# Altium PCB VDK (1).pcbdoc
Units mil, origin at the board's own origin, x right, y up, seen from the top; angles counter-clockwise.
Board outline 6000.63 x 3422.47 mil, 2 copper layers (Top Layer, Bottom Layer); 38 components, 51 nets, 148 pads, 0 vias.
Unrouted connection lines stored in the file: 12.
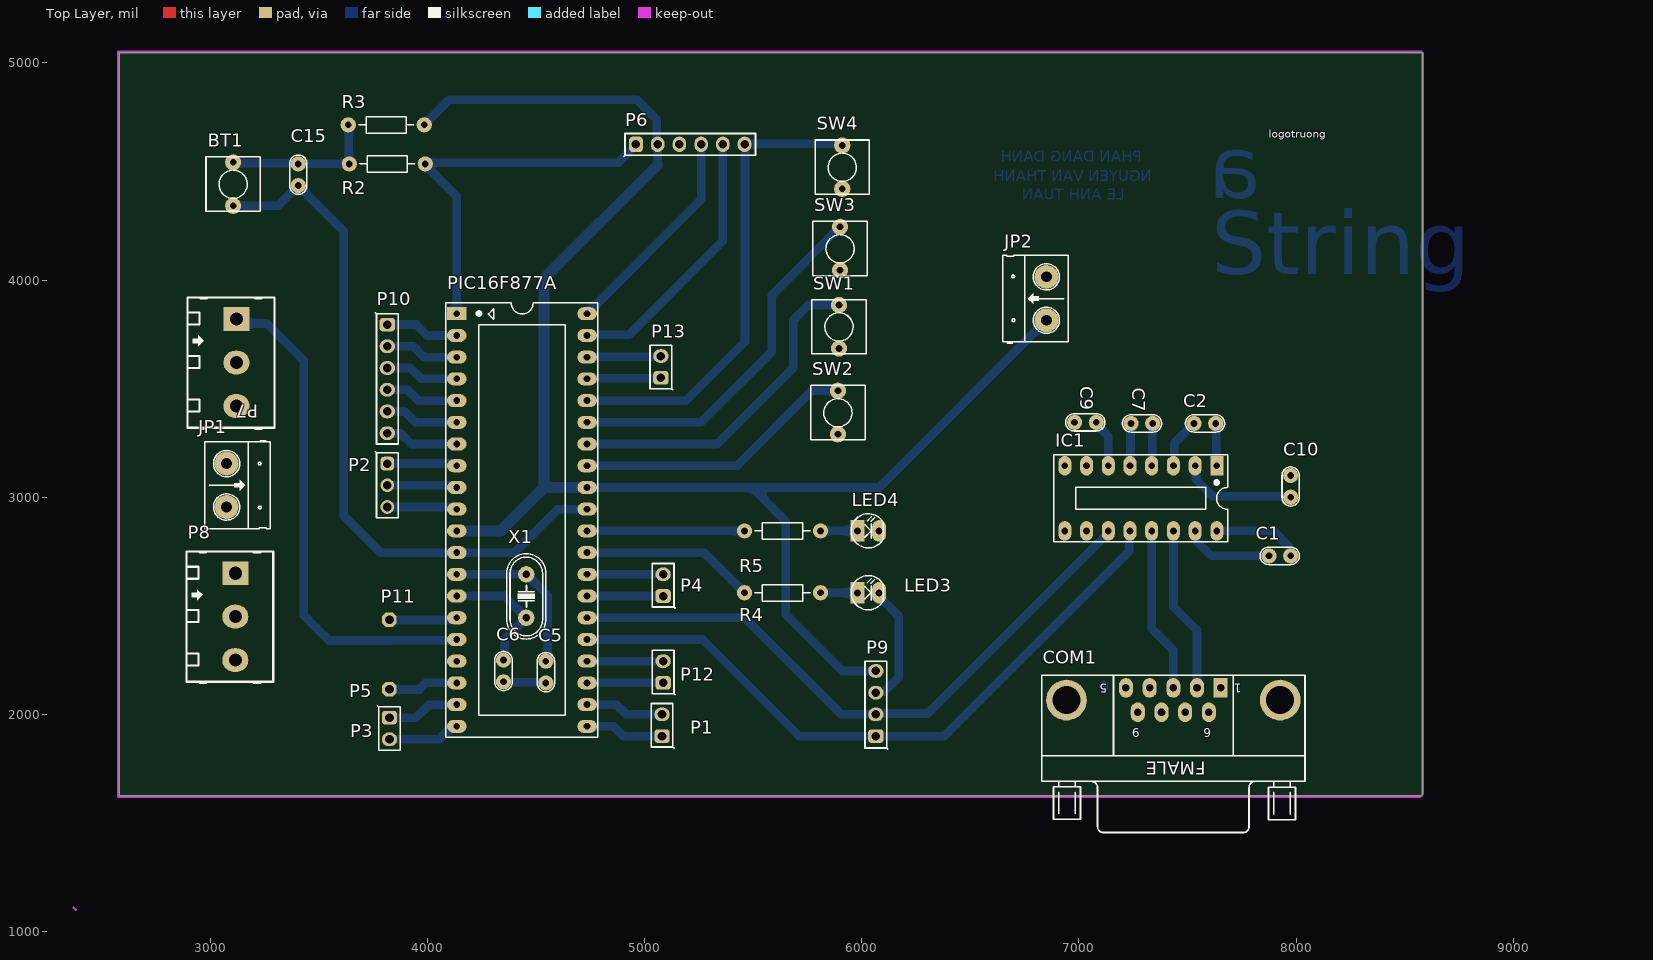
[diagram p0: Top Layer view]
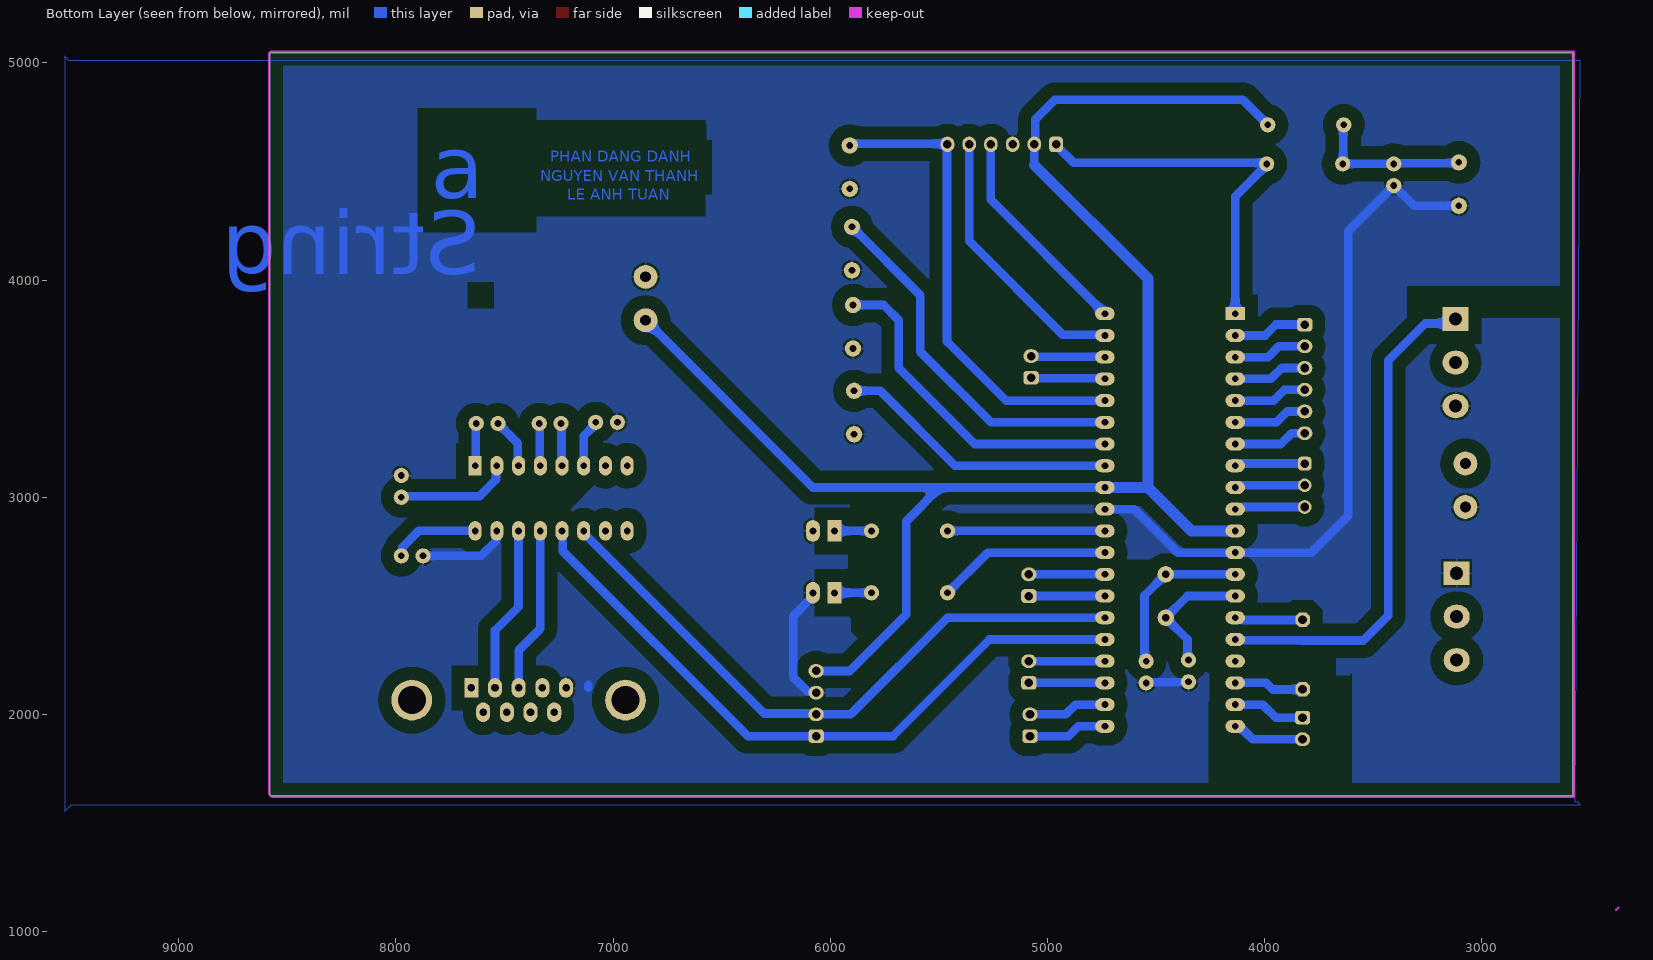
[diagram p1: Bottom Layer view, seen from below]

## Layer stack, top to bottom
Top Solder: solder mask 0.4, Solder Resist, Dk 3.5
Top Layer: signal copper 1.4
Dielectric 1: dielectric 12.6, FR-4, Dk 4.8
Bottom Layer: signal copper 1.4
Bottom Solder: solder mask 0.4, Solder Resist, Dk 3.5

## Board outline
2580.02,1625.02 2580.01,5010 2580.01,5047.48 8580.64,5047.48 8579.98,5045 8579.99,1665 8579.99,1626.89 8578.11,1625.01 8570.26,1625.01

## Design rules (kind name [scope] priority, off if disabled: settings)
Clearance [All] p1: gap=60 ignorepadtopadclearanceinfootprint=FALSE
PolygonConnect [All] p1: connectstyle=Relief reliefconductorwidth=10 reliefentries=4 polygonreliefangle="90 Angle" airgapwidth=10
RoomDefinition "main (1)23" [InComponentClass('main (1)23')] p1: confinementstyle=ConfineIn formatcopy=TRUE lockcomponents=FALSE outline 0,0 2000,0 2000,1000 0,1000
RoutingVias [All] p1: holewidth=28 width=50 viastyle="Through Hole" minholewidth=28 minwidth=50 maxholewidth=28 maxwidth=50
SolderMaskExpansion [All] p1: expansion=4 istentingtop=FALSE
Width [All] p1: maxlimit=40 minlimit=10 preferedwidth=40 toplayer_maxwidth=10 toplayer_prefwidth=10 bottomlayer_minwidth=40 minimp=50.000000 maximp=50.000000 favimp=50.000000
30 further rules are at their usual default settings.

## Components (designator, comment, footprint, x,y, rotation, side; value= is the part's Value field where it differs from the comment)
BT1 "B1" SW2 3105.05,4342.06 r90 top value="SW chip 2 pin"
C1 "2.2uF" CN1 7975,2730 r180 top value=100pF
C2 "2.2uF" CN1 7530,3340 r0 top value=100pF
C5 "15pF" CN1 4545,2245 r270 top value=100pF
C6 "15pF" CN1 4350,2250 r270 top value=100pF
C7 "2.2uF" CN1 7240,3340 r0 top value=100pF
C9 "2.2uF" CN1 7080,3345 r180 top value=100pF
C10 "2.2uF" CN1 7975,3100 r270 top value=100pF
C15 "104" CN1 3405,4435 r90 top value=33pF
COM1 "COM 9 FMALE" "DSB 9-F" 7434.53,2065.91 r180 top value="COM 9"
IC1 "MAX232" DIP16/W0.3 7635,3145 r180 top
JP1 "Header 2_1" HED2 3075,3155 r270 top value="Header 2"
JP2 "Header 2_1" HED2 6850,3815 r90 top value="Header 2"
LED3 "LED" LED-3 5980,2560 r0 top value="LED 3 ly Single Colour"
LED4 "LED" LED-3 5980,2845 r0 top value="LED 3 ly Single Colour"
P1 "Header 2" HDR/Header/2 5080,1950 r90 top
P2 "Header 3" HDR/Header/3/c1 3815,3055 r270 top
P3 "Header 2" HDR/Header/2 3825,1935 r270 top
P4 "Header 2" HDR/Header/2 5085,2595 r90 top
P5 "Header 1" HDR/Header/1 3825,2115 r270 top
P6 "Header 6" HDR/Header/6 5210,4625 r0 top
P7 "Header 3" HDR/Terminal/3 3120,3620 r270 top
P8 "Header 3" HDR/Terminal/3 3115,2450 r270 top
P9 "Header 4" HDR/Header/4 6065,2050 r90 top
P10 "Header 6" HDR/Header/6 3815,3545 r270 top
P11 "Header 1" HDR/Header/1 3825,2435 r0 top
P12 "Header 2" HDR/Header/2 5085,2195 r90 top
P13 "Header 2" HDR/Header/2 5075,3600 r90 top
PIC16F877A "" DIP40/W0.6 4135,3845 r270 top value=PIC16F877A
R2 "470R" R1/4W 3990,4535 r180 top value="R1/4W - 1K"
R3 "4.7k" R1/4W 3635,4715 r0 top value="R1/4W - 1K"
R4 "Res1" R1/4W 5810,2560 r180 top value=330R
R5 "Res1" R1/4W 5810,2845 r180 top value=330R
SW1 "ON" SW2 5895,3685 r90 top value="SW chip 2 pin"
SW2 "OFF" SW2 5890,3290 r90 top value="SW chip 2 pin"
SW3 "ON" SW2 5900,4045 r90 top value="SW chip 2 pin"
SW4 "OFF" SW2 5910,4420 r90 top value="SW chip 2 pin"
X1 "4Mhz" XT2 4455,2545 r90 top

## Footprints (in the part's own frame and the unit in brackets; to place one, negate y for a bottom-side part, rotate by r counter-clockwise, add the part's x,y. Pads: shape width x height; smd on the part's side, far side on the other; paste and mask are expansions set on the pad)
CN1 [mil]
  round 70 hole 31: 1(0,0) 2(100,0)
  silkscreen extent -40,-40 141,40, body extent -60,-30 170,37, height 265
DIP16/W0.3 [mil] "16 PIN, W 300mil, Pin to pin 100mil"
  rect 60x90 hole 31: 1(0,0)
  oval 60x90 hole 31: 2(100,0) 3(200,0) 4(300,0) 5(400,0) 6(500,0) 7(600,0) 8(700,0) 9(700,300) 10(600,300) 11(500,300) 12(400,300) 13(300,300) 14(200,300) 15(100,300) 16(0,300)
  silkscreen extent -50,-50 750,350, body extent -52,-57 752,356, height 299
DIP40/W0.6 [mil] "40 PIN, W 600mil, Pin to pin 100mil"
  rect 60x90 hole 31: 1(0,0)
  oval 60x90 hole 31: 2(100,0) 3(200,0) 4(300,0) 5(400,0) 6(500,0) 7(600,0) 8(700,0) 9(800,0) 10(900,0) 11(1000,0) 12(1100,0) 13(1200,0) 14(1300,0) 15(1400,0) 16(1500,0) 17(1600,0) 18(1700,0) 19(1800,0) 20(1900,0) 21(1900,600) 22(1800,600) 23(1700,600) 24(1600,600) 25(1500,600) 26(1400,600) 27(1300,600) 28(1200,600) 29(1100,600) 30(1000,600) 31(900,600) 32(800,600) 33(700,600) 34(600,600) 35(500,600) 36(400,600) 37(300,600) 38(200,600) 39(100,600) 40(0,600)
  silkscreen extent -50,-50 1950,650, body extent -82,-10 1982,600, height 224
"DSB 9-F" [mil] "COM FMALE - D Subminiature; 9 Position; Right Angle; Pitch 1.385 mm"
  rect 65x90 hole 35: 1(-218.11,-55.91)
  oval 65x90 hole 35: 2(-109.05,-55.91) 3(0,-55.91) 4(109.06,-55.91) 5(218.11,-55.91) 6(-163.58,55.91) 7(-54.53,55.91) 8(54.53,55.91) 9(163.58,55.91)
  round 187.4 hole 128.35: 10(-491.93,0) 11(491.93,0)
  silkscreen extent -606,-114 606,610, body extent -604,-138 608,613, height 495
HDR/Header/1 [mm]
  oct 1.7x1.7 hole 1: 1(0,0)
  body extent -1.27,-1.27 1.27,1.27, height 8.89
HDR/Header/2 [mm]
  rrect50% 1.6x1.8 hole 1: 1(-1.27,0)
  oval 1.6x1.8 hole 1: 2(1.27,0)
  silkscreen extent -2.67,-1.4 2.54,1.27, body extent -2.54,-1.27 2.54,1.27, height 8.89
HDR/Header/3/c1 [mm]
  rrect50% 1.6x1.6 hole 1: 1(-2.54,0)
  round 1.6 hole 1: 2(0,0) 3(2.54,0)
  silkscreen extent -3.94,-1.4 3.81,1.27, body extent -3.81,-1.27 3.81,1.27, height 8.89
HDR/Header/4 [mm]
  rrect50% 1.6x1.8 hole 1: 1(-3.81,0)
  oval 1.6x1.8 hole 1: 2(-1.27,0) 3(1.27,0) 4(3.81,0)
  silkscreen extent -5.33,-1.4 4.95,1.27, body extent -5.08,-1.27 5.08,1.27, height 8.89
HDR/Header/6 [mm]
  rrect50% 1.6x1.8 hole 1: 1(-6.35,0)
  oval 1.6x1.8 hole 1: 2(-3.81,0) 3(-1.27,0) 4(1.27,0) 5(3.81,0) 6(6.35,0)
  silkscreen extent -7.75,-1.4 7.62,1.27, body extent -7.62,-1.27 7.62,1.27, height 8.38
HDR/Terminal/3 [mil]
  rect 110x120 hole 60: 1(-200,0)
  oval 110x120 hole 60: 2(0,0) 3(200,0)
  silkscreen extent -300,-225 305,175, body extent -329,-218 300,168, height 559
HED2 [mil] "Header 2, 2 pin, hight 300mil, Pin to Pin 200, Colour Green"
  round 110 hole 50: 1(0,0) 2(200,0)
  silkscreen extent -106,-100 300,200, body extent -92,-140 302,155, height 394
LED-3 [mil] "LED 2 PIN, 3ly Only colour"
  rect 65x100 hole 32: 1(0,0)
  oval 65x100 hole 32: 2(100,0)
  silkscreen extent -29,-78 118,79, body extent -25,-75 113,75, height 217
R1/4W [mil] "R 1/4W, 2 Pin, 350mil"
  round 70 hole 31: 1(0,0) 2(350,0)
  silkscreen extent 48,-38 302,38, body extent -40,-47 386,47, height 111
SW2 [mil] "SW button 2pin, 250x 250 mil"
  round 75 hole 31: 1(0,0) 2(200,0)
  silkscreen extent -25,-125 225,125
XT2 [mil] "Footpin for Crystal 2 pin"
  round 75 hole 34: 1(-100,0) 2(100,0)
  silkscreen extent -198,-90 195,90, body extent -233,-93 213,90, height 138

## Part data
BT1 SW1 SW2 SW3 SW4: library part SW2, "Switch button 2 pin"
C1 C2 C5 C6 C7 C9 C10: library part CN1, "Cap np  1pF - 472pF"
C15: library part CN0, "Cremic For Xtal 1pF => 100pF"
COM1: library part DSB9F, "COM 9", PackageDocument=O, DatasheetDocument=1-Sep-1999, Gender=Receptacle, LatestRevisionDate=17-Jul-2002, LatestRevisionNote="Re-released for DXP Platform.", Orientation="Right Angle", PackageReference=788750, Positions=9, Published=15-Jun-2001, Publisher="Altium Limited"
IC1: "Dual EIA-232 Driver/Receiver"
JP1 JP2: "Header, 2-Pin", Manufacturer="Generic Components", Class=Connector
LED3 LED4: "LED Single colour Green and Red"
P1 P3 P4 P12 P13: "Header, 2-Pin"
P2 P7 P8: "Header, 3-Pin"
P5 P11: "Header, 1-Pin"
P6 P10: "Header, 6-Pin"
P9: "Header, 4-Pin"
PIC16F877A: library part 16F877, "8K FLASH, 368B RAM, 256B EFROM", Copyright by=VanDungEvn
R2 R3: library part R1/4W, "Resistor 1/4W"
R4 R5: library part Res1_1, "Resistor", Manufacturer="Generic Components", Class=Passive, Published=08/06/2000, Publisher="Altium Hobart Technology Centre", SubClass=Resistor
X1: library part XT2, "Crystal For all Crystal 2pin."

## Nets (pads, with @x,y where several pads share a name; then routed paths per layer and width w, separated by ;. In a path a pad name is that pad's centre, name@x,y a point inside that pad or via, vN(x,y) a via of type N, cw(c..) or ccw(c..) an arc to the next point about the centre after c; other vN are vias at no path point)
GND: BT1.1 C1.2 C5.2 C6.2 C9.2 C10.1 C15.1 COM1.5 IC1.15 JP1.2 JP2.2 LED3.2 LED4.2 P6.3 P7.3 P8.1 P9.3 PIC16F877A.12 PIC16F877A.31 SW1.1 SW2.1 SW3.1 SW4.1 | length 4443.8
  Bottom Layer w30: BT1.1 BT1.1@3113.39,4333.72 ; SW1.1 SW1.1@5902.5,3677.5
  Bottom Layer w40: BT1.1 3312.06,4342.06 C15.1 3615,4225 3615,2915 3785,2745 PIC16F877A.12 4400,2745 4600,2945 PIC16F877A.31@4755.41,2945 ; C6.2 4352.5,2147.5 4542.5,2147.5 C5.2 ; P9.3 6069.4,2104.4 6102.73,2104.4 6170,2171.67 6170,2452.5 6080,2542.5 LED3.2 ; 7113.78,2122.5 7113.78,2135 ; IC1.15 7538.83,2841.17 7538.83,2798.89 7607.72,2730 C1.2
IRQ: P12.2 PIC16F877A.24 | length 350
  Bottom Layer w40: PIC16F877A.24 P12.2
MCRL: P6.1 PIC16F877A.1 R2.1 | length 1776.7
  Bottom Layer w40: PIC16F877A.1 4135,4385 3980,4540 4878.94,4540 4960,4621.06 P6.1
NetBT1_2: BT1.2 C15.2 R2.2 R3.1 | length 719.9
  Bottom Layer w40: BT1.2 3108.58,4538.53 3401.47,4538.53 C15.2 R2.2 3637.5,4537.5 3637.5,4712.5 R3.1
NetC1_1: C1.1 IC1.16 | length 407.8
  Bottom Layer w40: IC1.16 7894.35,2845 7969.26,2770.09 7969.26,2735.74 C1.1
NetC2_1: C2.1 IC1.3 | length 234.4
  Bottom Layer w40: IC1.3 7438.83,3148.83 7438.83,3248.83 C2.1
NetC2_2: C2.2 IC1.1 | length 197.1
  Bottom Layer w40: C2.2 7632.5,3337.5 7632.5,3147.5 IC1.1
NetC7_1: C7.1 IC1.5 | length 197.1
  Bottom Layer w40: IC1.5 7237.5,3147.5 7237.5,3337.5 C7.1
NetC7_2: C7.2 IC1.4 | length 197.1
  Bottom Layer w40: IC1.4 7337.5,3147.5 7337.5,3337.5 C7.2
NetC9_1: C9.1 IC1.6 | length 222.8
  Bottom Layer w40: C9.1 7080,3336.88 7135,3281.88 IC1.6
NetC10_2: C10.2 IC1.2 | length 535.1
  Bottom Layer w40: IC1.2 7538.83,3141.17 7538.83,3081.32 7615.15,3005 7970,3005 C10.2
NetCOM1_2: COM1.2 IC1.14 | length 768.2
  Bottom Layer w40: IC1.14 7435,2495 7543.58,2386.42 COM1.2
NetCOM1_3: COM1.3 IC1.13 | length 768.8
  Bottom Layer w40: 7331.89,2135 7333.44,2136.55 ; IC1.13@7333.44,2843.45 IC1.13 7335,2395 7434.53,2295.47 COM1.3
NetLED3_1: LED3.1 R4.1 | length 170
  Bottom Layer w40: R4.1 LED3.1
NetLED4_1: LED4.1 R5.1 | length 173.5
  Bottom Layer w40: R5.1 LED4.1 LED4.1@5977.5,2847.5
OSC1: C5.1 PIC16F877A.13 X1.2 | length 763.5
  Bottom Layer w40: PIC16F877A.13 X1.2 4552.5,2547.5 4552.5,2260.62 4545,2253.12 C5.1
OSC2: C6.1 PIC16F877A.14 X1.1 | length 599.9
  Bottom Layer w40: PIC16F877A.14 4355,2545 X1.1 4355,2345 4355,2255 C6.1
RA0: P10.1 PIC16F877A.2 | length 340.7
  Bottom Layer w40: P10.1 3947.51,3795 3997.51,3745 PIC16F877A.2
RA1: P10.2 PIC16F877A.3 | length 340.7
  Bottom Layer w40: P10.2 3934.37,3695 3984.37,3645 PIC16F877A.3
RA2: P10.3 PIC16F877A.4 | length 340.7
  Bottom Layer w40: P10.3 3921.24,3595 3971.24,3545 PIC16F877A.4
RA3: P10.4 PIC16F877A.5 | length 352.8
  Bottom Layer w30: P10.4 3815,3500 P10.4@3820,3505
  Bottom Layer w40: P10.4 3908.1,3495 3958.1,3445 PIC16F877A.5
RA4: P10.5 PIC16F877A.6 | length 340.7
  Bottom Layer w40: P10.5 3894.96,3395 3944.96,3345 PIC16F877A.6
RA5: P10.6 PIC16F877A.7 | length 340.7
  Bottom Layer w40: P10.6 3875,3295 3925,3245 PIC16F877A.7
RB0: PIC16F877A.33 SW2.2 | length 1297.9
  Bottom Layer w40: PIC16F877A.33 5425,3145 5770,3490 SW2.2
RB1: PIC16F877A.34 SW1.2 | length 1554
  Bottom Layer w40: PIC16F877A.34 5335,3245 5685,3595 5685,3815 5755,3885 SW1.2
RB2: PIC16F877A.35 SW3.2 | length 1690.1
  Bottom Layer w40: PIC16F877A.35 5260,3345 5585,3670 5585,3930 SW3.2
RB3: P6.6 PIC16F877A.36 SW4.2 | length 2163.9
  Bottom Layer w40: PIC16F877A.36 5190,3445 5462.5,3717.5 5462.5,4627.5 5872.5,4627.5 SW4.2@5875,4630
RB4: P13.1 PIC16F877A.37 | length 342.1
  Bottom Layer w40: PIC16F877A.37 4737.5,3547.5 5072.5,3547.5 P13.1
RB5: P13.2 PIC16F877A.38 | length 342.1
  Bottom Layer w40: PIC16F877A.38 4737.5,3647.5 5072.5,3647.5 P13.2
RB6: P6.5 PIC16F877A.39 | length 1250.2
  Bottom Layer w40: PIC16F877A.39 4738.83,3748.83 4928.83,3748.83 5360,4180 P6.5
RB7: P6.4 PIC16F877A.40 | length 1003.1
  Bottom Layer w40: PIC16F877A.40 4744.59,3845 4753.83,3854.24 4753.83,3863.83 5260,4370 P6.4
RC0: P11.1 PIC16F877A.15 | length 314.1
  Bottom Layer w40: P11.1 4104.59,2435 4114.59,2445 PIC16F877A.15
RC1: P7.1 PIC16F877A.16 | length 2318.4
  Bottom Layer w40: P7.1 3139.98,3800.02 3259.98,3800.02 3430,3630 3430,2455 3545,2340 3827.29,2340 3828.83,2341.54 4131.54,2341.54 PIC16F877A.16
RC2: P8.3 PIC16F877A.17 | length 5.4
  Bottom Layer w40: PIC16F877A.17@4131.17,2248.83 PIC16F877A.17
RD0: P3.1 PIC16F877A.19 | length 338.4
  Bottom Layer w40: P3.1 3947.51,1985 4007.51,2045 PIC16F877A.19 PIC16F877A.19@4132.5,2042.5
RD1: P3.2 PIC16F877A.20 | length 338.4
  Bottom Layer w40: P3.2 4054.59,1885 4114.59,1945 PIC16F877A.20 PIC16F877A.20@4132.5,1942.5
RD2: P1.1 PIC16F877A.21 | length 363.6
  Bottom Layer w40: PIC16F877A.21 4856.86,1945 4901.86,1900 P1.1
RD3: P1.2 PIC16F877A.22 | length 363.6
  Bottom Layer w40: PIC16F877A.22 4870,2045 4915,2000 P1.2
RD4: P4.1 PIC16F877A.27 | length 353.5
  Bottom Layer w30: P4.1@5082.5,2527.5 P4.1@5085,2530
  Bottom Layer w40: PIC16F877A.27 P4.1
RD5: P4.2 PIC16F877A.28 | length 353.5
  Bottom Layer w30: P4.2@5082.5,2627.5 P4.2@5085,2630
  Bottom Layer w40: PIC16F877A.28 P4.2
RD6: PIC16F877A.29 R4.2 | length 801.6
  Bottom Layer w40: PIC16F877A.29 5275,2745 R4.2
RD7: PIC16F877A.30 R5.2 | length 728.5
  Bottom Layer w40: PIC16F877A.30@4737.5,2847.5 PIC16F877A.30 R5.2
RE0: P2.1 PIC16F877A.8 | length 327.7
  Bottom Layer w30: P2.1 P2.1@3817.5,3152.5
  Bottom Layer w40: P2.1 4104.59,3155 4114.59,3145 PIC16F877A.8
RE1: P2.2 PIC16F877A.9 | length 327.7
  Bottom Layer w30: P2.2 P2.2@3817.5,3052.5
  Bottom Layer w40: P2.2 4104.59,3055 4114.59,3045 PIC16F877A.9
RE2: P2.3 PIC16F877A.10 | length 327.7
  Bottom Layer w30: P2.3 P2.3@3817.5,2952.5
  Bottom Layer w40: P2.3 4104.59,2955 4114.59,2945 PIC16F877A.10
RX: IC1.11 P9.2 PIC16F877A.26 | length 2940.2
  Bottom Layer w40: PIC16F877A.26 5460,2445 5905,2000 P9.2 6075.66,2000 6079.56,2003.9 6303.9,2003.9 7135,2835 IC1.11
SCL: P5.1 PIC16F877A.18 | length 322.4
  Bottom Layer w40: P5.1 3961.53,2115 3991.53,2145 PIC16F877A.18
SDA: P12.1 PIC16F877A.23 | length 350
  Bottom Layer w40: PIC16F877A.23 P12.1
TX: IC1.12 P9.1 PIC16F877A.25 | length 3128.5
  Bottom Layer w40: PIC16F877A.25 5266.15,2345 5711.15,1900 P9.1 6380,1900 7231.17,2751.17 7231.17,2841.17 IC1.12
VCC: JP1.1 P7.2 P8.2
VDD: JP2.1 P6.2 P9.4 PIC16F877A.11 PIC16F877A.32 R3.2 | length 7353.4
  Bottom Layer w40: R3.2 4100,4830 4965,4830 5055.6,4739.4 5055.6,4629.4 P6.2 5060,4530 ; PIC16F877A.32 5495,3045 ; P9.4@6061.06,2200 5910,2200 5650,2460 5650,2890 5495,3045 ; JP2.1 6080,3045 5495,3045
  Bottom Layer w50: PIC16F877A.11 4336.91,2845 4536.91,3045 ; PIC16F877A.32 4536.91,3045 ; 5060,4530 4536.91,4006.91 4536.91,3045
pads on no net: COM1.1 COM1.4 COM1.6 COM1.7 COM1.8 COM1.9 COM1.10 COM1.11 IC1.7 IC1.8 IC1.9 IC1.10

## Polygon pours and split planes (outlines as drawn)
GND on Bottom Layer "GND_L02_P026" (solid, pour order 26): 2575,5052.5 8577.5,5052.5 8580,5050 8580,1620 8560,1640 2595,1640 2585,1630 2570,1630
no net on Bottom Layer "NONET_L02_P019" (solid, pour order 19): 2575,5052.5 2575,1620
no net on Bottom Layer "NONET_L02_P000" (solid, shelved, pour order 0): 2545,5010 9505,5010 9525,5030 9525,1555 9495,1585 2545,1585 2555,1595 2570,1595

## Keep-outs
Keep-Out Layer:
  lines w10: 2370,1110 2380,1100 ; 8577.5,5052.5 2575,5052.5 2575,5010 2575,1620 8570.26,1620 8585,1634.74 8585,1665 8585,5045

## Other copper
Bottom Layer:
  pour cut-out: 5715,2475 5780,2410 5780,2400 5825,2355 5825,2350 5875,2350 5905,2380 5905,2440 5915,2450 5915,2495 5895,2515 5755,2515 5750,2510 5715,2510
  pour cut-out: 5725,2795 5725,2690 5715,2680 5715,2620 5730,2605 5800,2605 5820,2625 5900,2625 5905,2630 5910,2630 5910,2665 5920,2675 5920,2775 5895,2800 5825,2800 5820,2795 5730,2795
  pour cut-out: 5680,2985 5680,2920 5730,2870 5780,2870 5810,2900 5870,2900 5880,2910 5895,2910 5910,2925 5910,2975 5895,2990 5840,2990 5825,3005 5715,3005 5705,2995
  pour cut-out: 5545,2875 5505,2835 5505,2785 5410,2785 5395,2770 5365,2770 5355,2760 5380,2735 5380,2705 5445,2640 5445,2625 5470,2625 5510,2585 5520,2585 5535,2570 5515,2550 5515,2485 5535,2465 5535,2455 5555,2455 5585,2425 5590,2430 5590,2620 5620,2650 5610,2660 5610,2820 5580,2850 5580,2900 5559,2900 5542,2883
  pour cut-out: 6575,4670 6575,4295 7380,4295 7380,4730 7375,4735 6575,4735 6575,4650 6570,4645
  pour cut-out: 4060,2260 4060,2245 3985,2170 3815,2170 3810,2165 3805,2170 3940,2170 3945,2175 3840,2175 3825,2160 3685,2160 3680,2155 3670,2165 3670,2260 3680,2270 3680,2280 3725,2280 3730,2285 3735,2280 4005,2280 4015,2270 4030,2270 4030,2260 4040,2250
  pour cut-out: 2620,3975 3350,3975 3345,3970 3345,3825 2610,3825 2595,3840 2625,3870 2625,3965
  pour cut-out: 7075,3065 7200,2940 7200,2910 7475,2910 7490,2895 7585,2895 7585,2945 7595,2955 7505,3045 7410,3045 7380,3075 7370,3065
  pour cut-out: 4460,2720 4465,2715 4665,2715 4665,2560 4660,2555 4650,2565 4605,2565 4605,2585 4450,2740
  pour cut-out: 4010,4635 4155,4780 4950,4780 4950,4735 4975,4710 4890,4625 4680,4625 4640,4585 4635,4590 4040,4590 4000,4630 4000,4635
  pour cut-out: 4895,4480 4905,4470 4745,4310 4745,4285 4485,4025 4485,3055 4325,2895 4215,2895 4215,4065 4170,4110 4170,4480
  pour cut-out: 5200,4585 5210,4575 5190,4555 5190,4360 5170,4360 4655,3845 4655,3120 4645,3110 4635,3120 4595,3120 4595,4005 4725,4135 4760,4135 4760,4170 5125,4535 5125,4585
  pour cut-out: 4820,3865 4820,3820 4840,3800 4850,3810 4925,3810 5075,3960 5080,3960 5300,4180 5300,4250 5250,4300 5250,4310 5255,4305 5255,4300
  pour cut-out: 5390,4115 5385,4115 5005,3735 5035,3705 5135,3705 5135,3630 5160,3605 5160,3525 5195,3525 5400,3730 5400,4105
  pour cut-out: 5170,2670 5170,2490 5375,2490 5390,2505 5340,2555 5340,2625 5235,2685 5165,2675
  pour cut-out: 5745,1960 5745,1955 5805,1955 5830,1980 5420,2390 5365,2390 5340,2365
  pour cut-out: 4320,2470 4355,2435 4295,2375 4295,2225 4255,2185 4255,2055 4225,2055 4220,2050 4210,2060 4210,2465 4215,2470
  pour cut-out: 3605,2195 3595,2185 3595,1625 4215,1625 4260,1670 4260,2060 4250,2070 4220,2070 4220,1955 4060,1795 3750,1795 3750,2145 3700,2195 3685,2180 3605,2180
  text "PHAN DANG DANH" at 7290,4545 h50
  text "NGUYEN VAN THANH" at 7335,4455 h50
  text "LE ANH TUAN" at 7210,4370 h50
  text "a" at 7840,4280 h500
  text "String" at 7610,3930 h500

## Silkscreen, mask and mechanical layers (free items; w line width, h text height)
Top Overlay:
  text "logotruong" at 7875,4645 h60

## Text inside footprints (layer, text, board x,y; h text height)
COM1: Top Overlay "FMALE" at 7584.53,1780.91 h60 r180; Top Overlay "6" at 7609.53,1935.91 h40 r180; Top Overlay "9" at 7279.53,1935.91 h40 r180; Top Overlay "5" at 7129.53,2140.91 h40 r180; Top Overlay "1" at 7749.53,2140.91 h40 r180